# Altium PCB bch-stmnode_v0.1.PcbDoc (part 2 of 3)
Units mm, origin at the board's own origin, x right, y up, seen from the top; angles counter-clockwise.
Board outline 93.3 x 100 mm, 4 copper layers (Top Layer, GND, VCC, Bot Layer), stack 1.564 mm thick; 150 components, 113 nets, 595 pads, 417 vias.
Unrouted connection lines stored in the file: 4.
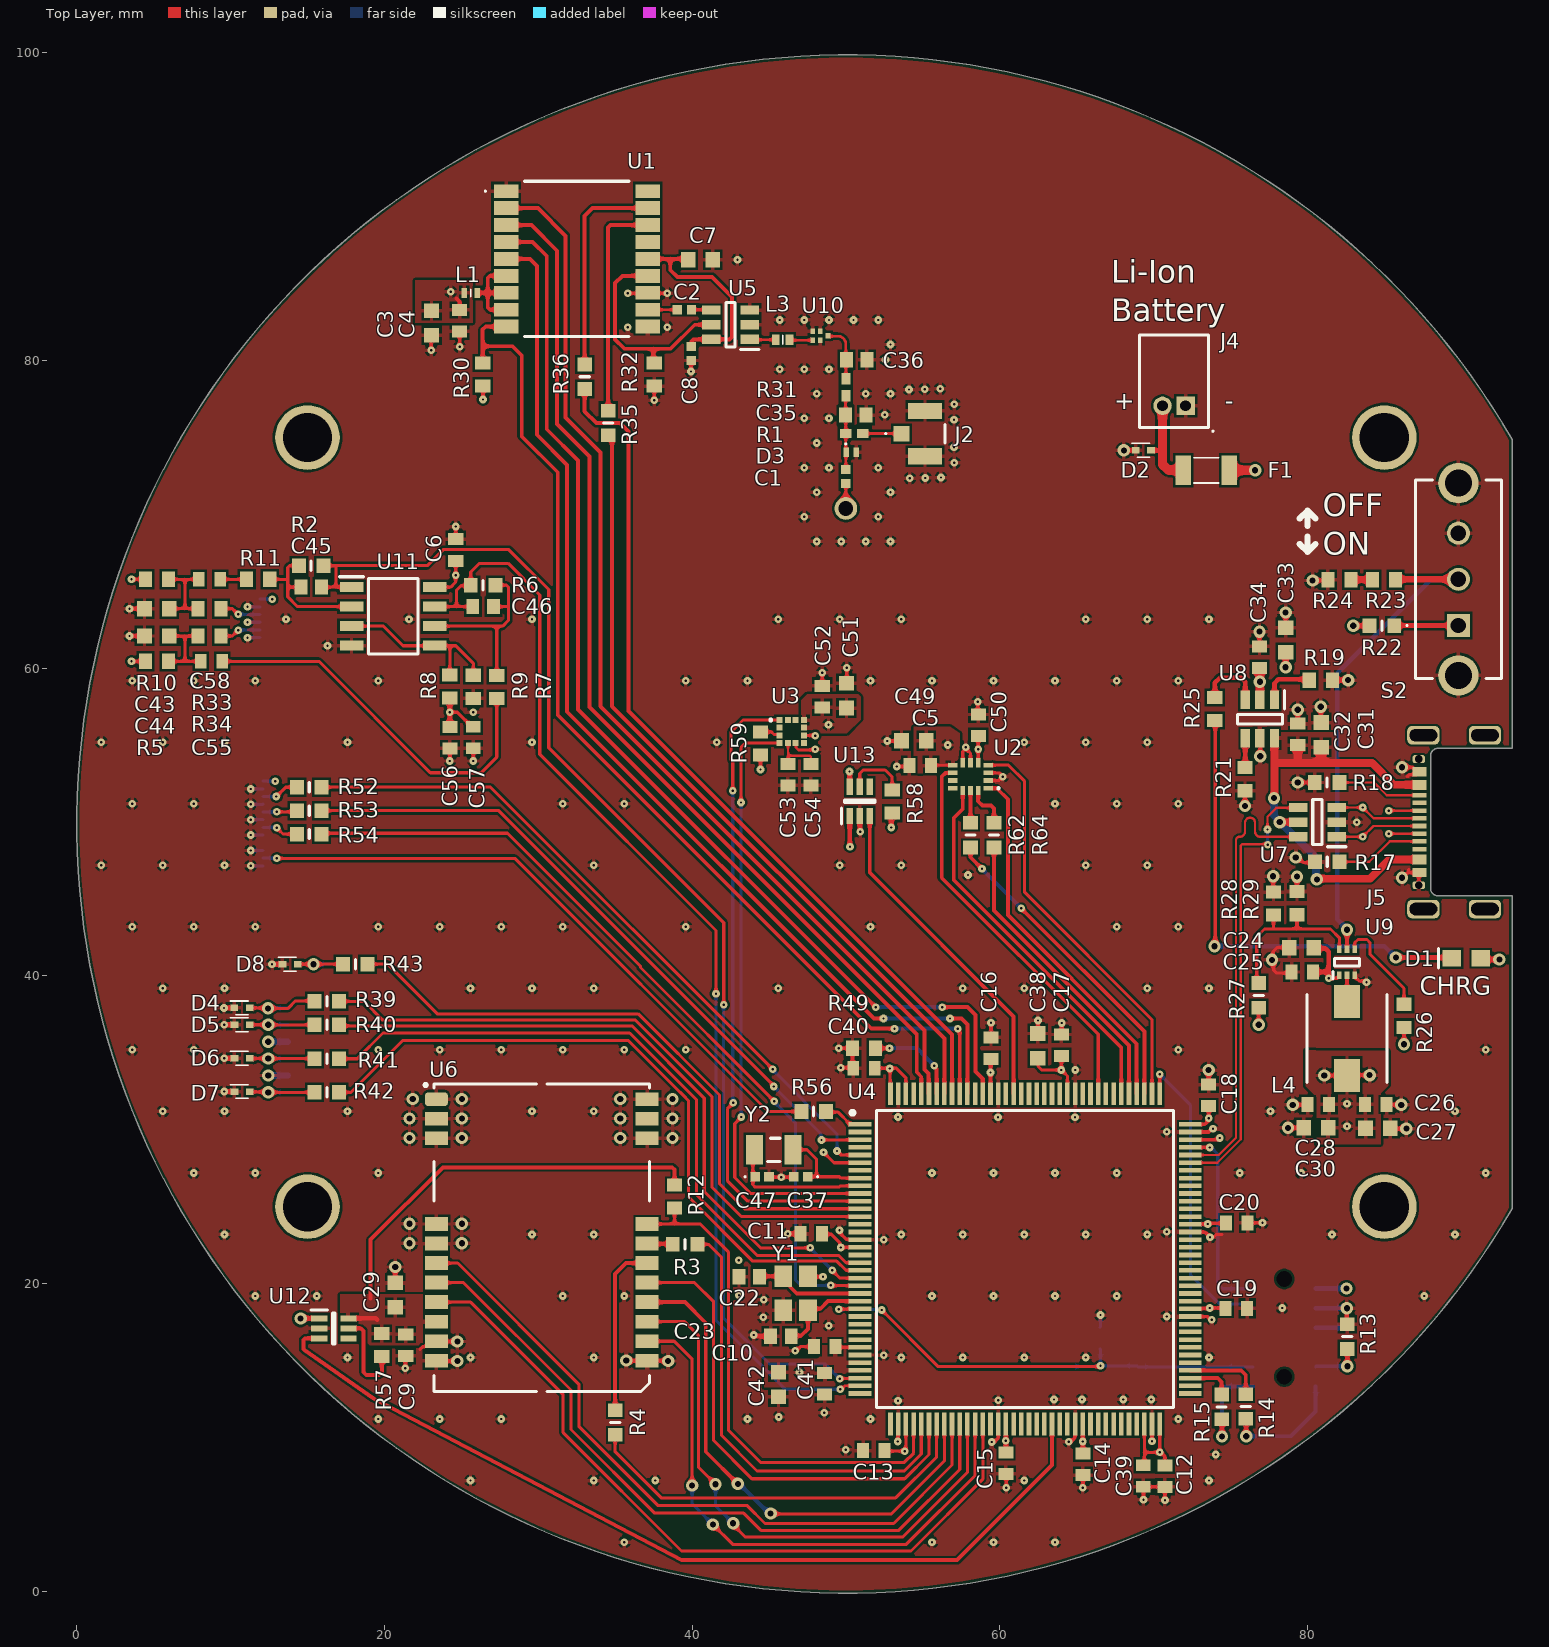
[diagram p0: Top Layer view]

## Part data (continued)
U4: "STM32H563ZIT6", Manufacturer_Name=STMicroelectronics, Mouser Part Number=511-STM32H563ZIT6, Arrow Part Number=STM32H563ZIT6, Arrow Price/Stock=https://www.arrow.com/en/products/stm32h563zit6/stmicroelectronics?utm_currency=USD&region=nac, Datasheet Link=https://www.st.com/resource/en/datasheet/stm32h562ag.pdf, Height=1.6mm, Manufacturer_Part_Number=STM32H563ZIT6, Mouser Price/Stock=https://www.mouser.co.uk/ProductDetail/STMicroelectronics/STM32H563ZIT6?qs=amGC7iS6iy9kqsV9OIos2w%3D%3D
U5: "1.55GHz~1.615GHz 21.5dB 1.4V~3.6V 0.8dB -14dBm 4.3mA DFN-6(1x1.6) RF Amplifiers RoHS", Manufacturer_Name="Hangzhou ZhongKe Microelectronics", Manufacturer_Part_Number=AT2659S, Datasheet Link=http://lanzhi-tech.com/filedownload/89817, Height=1.25mm
U6: library part EMCU+E22-900M22S, "-147dBm 22.3dBm 7km SPI SMD,14x20mm LoRa Modules ROHS"
U7: library part EU+ESDUSBLC6, "Low Cap. ESD Protection Auto SOT-23-6 STMicroelectronics USBLC6-2SC6Y, Dual Uni-Directional TVS Diode Array, 6-Pin SOT-23", Manufacturer_Name=STMicroelectronics, Mouser Part Number=511-USBLC6-2SC6Y, Arrow Part Number=USBLC6-2SC6Y, Arrow Price/Stock=https://www.arrow.com/en/products/usblc6-2sc6y/stmicroelectronics.html?utm_currency=USD&region=nac, Datasheet Link=https://www.st.com/resource/en/datasheet/usblc6-2sc6y.pdf, Geometry.Height=1.45mm, Manufacturer_Part_Number=USBLC6-2SC6Y, Mouser Price/Stock=https://www.mouser.co.uk/ProductDetail/STMicroelectronics/USBLC6-2SC6Y?qs=gNDSiZmRJS%2FOgDexvXkdow%3D%3D
U8: library part EU+BQ21040DBVR, "Battery Management 1-cell 0.8-A Li-ion and Li-polymer batt A 595-BQ21040DBVT", Manufacturer_Name="Texas Instruments", Mouser Part Number=595-BQ21040DBVR, Arrow Part Number=BQ21040DBVR, Arrow Price/Stock=https://www.arrow.com/en/products/bq21040dbvr/texas-instruments?utm_currency=USD&region=nac, Datasheet Link=http://www.ti.com/lit/gpn/bq21040, Height=1.45mm, Manufacturer_Part_Number=BQ21040DBVR, Mouser Price/Stock=https://www.mouser.co.uk/ProductDetail/Texas-Instruments/BQ21040DBVR?qs=cttFivMKqWyovUuY6Xwwcw%3D%3D
U9: library part EU+TPS563252DRLR, "Switching Voltage Regulators 3-V to 17-V input vo ltage 3-A 1.2-Mhz", Manufacturer_Name="Texas Instruments", Mouser Part Number=595-TPS563252DRLR, Arrow Part Number=TPS563252DRLR, Arrow Price/Stock=https://www.arrow.com/en/products/tps563252drlr/texas-instruments?utm_currency=USD&region=nac, Datasheet Link=https://www.ti.com/lit/ds/symlink/tps563252.pdf?ts=1715244064437&ref_url=https%253A%252F%252Fwww.mouser.in%252F, Height=0.6mm, Manufacturer_Part_Number=TPS563252DRLR, Mouser Price/Stock=https://www.mouser.co.uk/ProductDetail/Texas-Instruments/TPS563252DRLR?qs=ulEaXIWI0c%252BIcG7y3AlP5A%3D%3D
U10: library part EU+GNSSSAW, "Signal Conditioning - 40 C to + 85 C 1.5824 GHz 1 dB 2 MHz, 4.092 MHz, 8.34 MHz 50 Ohms GNSS", Arrow Part Number=B39162B4327P810, Manufacturer_Name=RF360, Mouser Part Number=871-B39162B4327P810, Arrow Price/Stock=https://www.arrow.com/en/products/b39162b4327p810/qualcomm-rf360-a-qualcomm-tdk-joint-venture?region=nac, Datasheet Link=https://mm.digikey.com/Volume0/opasdata/d220001/medias/docus/992/B39162B4327P810_Rev2.2.pdf, Height=0.45mm, Manufacturer_Part_Number=B39162B4327P810, Mouser Price/Stock=https://www.mouser.co.uk/ProductDetail/RF360/B39162B4327P810?qs=lGUynpphgXxwtn5A8O%2FIyg%3D%3D
U11: library part EU+OPA2607IDR, "Operational Amplifiers - Op Amps Dual-channel low-po wer precision 50-M", Arrow Part Number=OPA2607IDR, Manufacturer_Name="Texas Instruments", Mouser Part Number=595-OPA2607IDR, Arrow Price/Stock=https://www.arrow.com/en/products/opa2607idr/texas-instruments, Datasheet Link=https://www.ti.com/lit/ds/symlink/opa2607.pdf, Height=1.75mm, Manufacturer_Part_Number=OPA2607IDR, Mouser Price/Stock=https://www.mouser.co.uk/ProductDetail/Texas-Instruments/OPA2607IDR?qs=zW32dvEIR3ss%2FpWvIqcTXw%3D%3D
U12 U13: library part EU+TPS22919, "Power Switch ICs - Power Distribution 1-ch 5.5V 1.5A 90 mOhm self-protected AE", Manufacturer_Name="Texas Instruments", Manufacturer_Part_Number=TPS22919QDCKRQ1, Mouser Part Number=595-TPS22919QDCKRQ1, Datasheet Link=https://www.ti.com/lit/gpn/tps22919-q1, Height=1.1mm, Mouser Price/Stock=https://cz.mouser.com/ProductDetail/Texas-Instruments/TPS22919QDCKRQ1?qs=sGAEpiMZZMvjbjwkTuU2aX%252BB0PF2SxcjkwPe0jmTNxcgLPqTFcsPcA%3D%3D
Y1: library part ECR+24MHZ, "Crystals WE-XTAL 24.0MHz 15ppm 3.2 x 2.5mm", Manufacturer_Name="Wurth Elektronik", Manufacturer_Part_Number=830107006509, Mouser Part Number=710-830107006509, Datasheet Link=https://www.we-online.com/catalog/datasheet/830107006509.pdf, Height=0.8mm, Mouser Price/Stock=https://www.mouser.co.uk/ProductDetail/Wurth-Elektronik/830107006509?qs=hWgE7mdIu5QkYkvr4tcl2g%3D%3D
Y2: library part ECR+32.768KHz, "Crystals WE-XTAL 32.768 kHz 7pF 70kOhms", Manufacturer_Name="Wurth Elektronik", Manufacturer_Part_Number=830009709, Mouser Part Number=710-830009709, Datasheet Link=https://www.we-online.com/catalog/datasheet/830009709.pdf, Height=0.9mm, Mouser Price/Stock=https://www.mouser.co.uk/ProductDetail/Wurth-Elektronik/830009709?qs=2WXlatMagcG5opfa%252B%2FO2MQ%3D%3D

## Via types
v1: diameter 0.5, hole 0.15, Top Layer to Bot Layer, 341 vias
v2: diameter 0.8, hole 0.4, Top Layer to Bot Layer, 76 vias

## Nets (pads, with @x,y where several pads share a name; then routed paths per layer and width w, separated by ;. In a path a pad name is that pad's centre, name@x,y a point inside that pad or via, vN(x,y) a via of type N, cw(c..) or ccw(c..) an arc to the next point about the centre after c; other vN are vias at no path point)
1PPS: U1.4 U4.132 | length 72.7
  Top Layer w0.254: U1.4@27.912,87.714 29.634,87.714 30.556,86.792 30.556,75.54 32.588,73.508 32.588,57.324 51.939,37.973 v1(51.943,37.973) ; v1(56.261,37.973) 57.912,37.973 58.42,37.465 58.42,33.782 58.902,33.3 U4.132@58.902,32.348
  Bot Layer w0.254: v1(51.943,37.973) v1(56.261,37.973)
1V65_REF_7: R8.1 R9.2 U11.3 U11.5 | length 11.6
  Top Layer w0.2: U11.3@17.863,62.738 19.939,62.738 21.209,61.468 U11.5@23.285,61.468 24.257,61.468 ; R8.1@24.257,59.563 24.257,61.468 ; R9.2@25.781,59.551 25.781,60.325 24.638,61.468 24.257,61.468